# EAGLE board flight comp v5 (EAGLE 9.4.2)
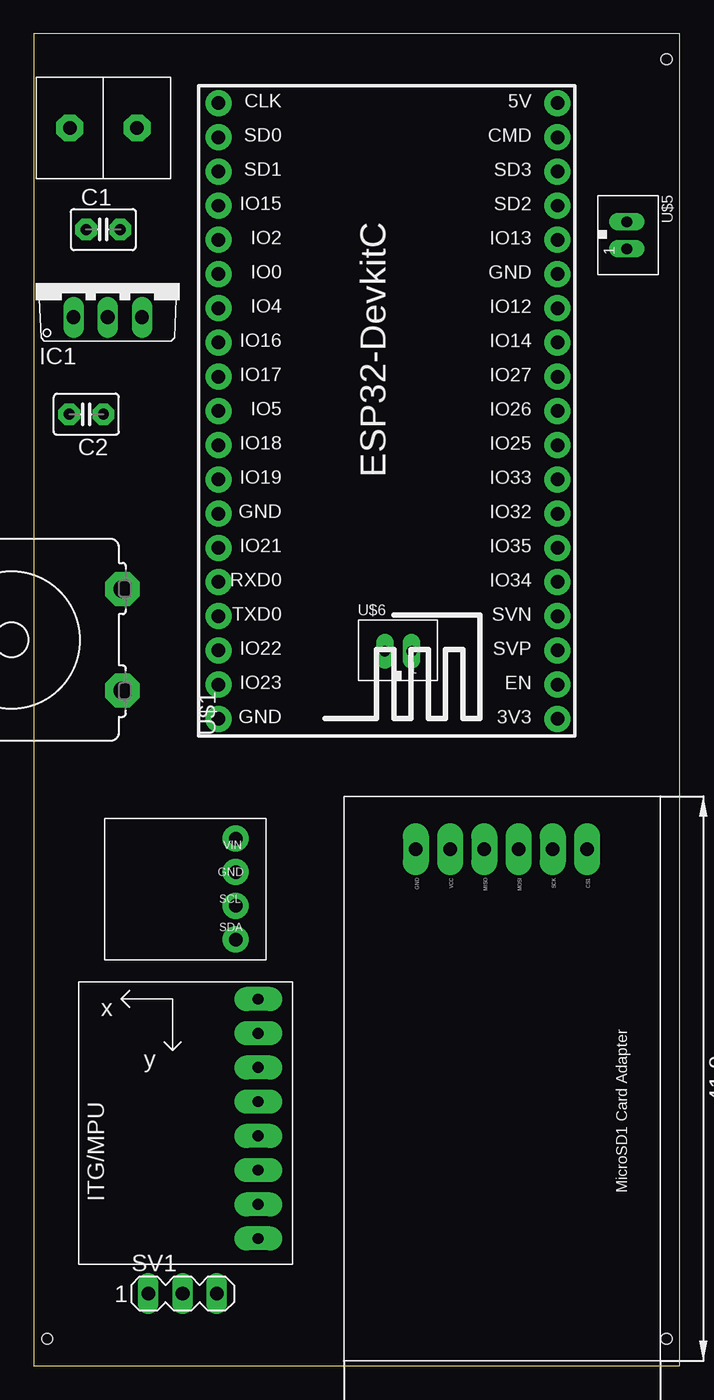
[diagram p0: board, top side]
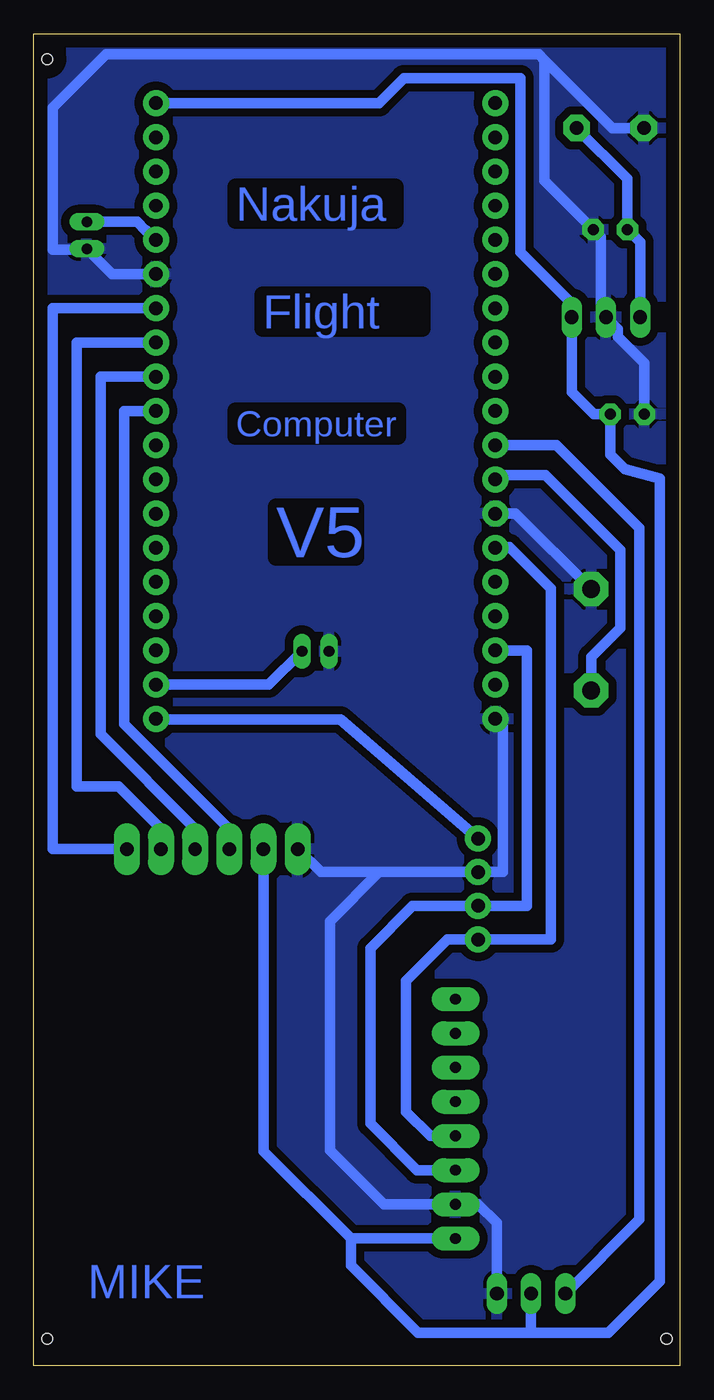
[diagram p1: board, bottom side, seen from below]

Size 48 x 98.9 mm. Coordinates in mm from the lower left corner, seen from the top.
Outline: 0,0 48,0 48,98.9 0,98.9 0,0
Copper layers (1*16): Top 0.035mm / dielectric 1.5mm / Bottom 0.035mm
Design rules "default *": minimum track width 30mil, minimum drill 0.35mm, track to track 20mil, track to pad 20mil, pad to pad 20mil, via to via 6mil, smd to smd 6mil, copper to edge 40mil, drill to drill 6mil, minimum pad ring 10mil, minimum via ring 8mil, stop-mask expansion 4mil, vias tented up to drill 0mil, thermal gap 10mil
Holes 0.8 mm at 47,97 47,2 1,2

## Footprints (pad centres in the part's own frame; a part is rotated, then mirrored left to right if it is on the bottom)
C2.5-3 = drill 0.813 pad 1.6 octagon: 1 -1.27,0; 2 1.27,0
TO220V = drill 1.016 long: 1 -2.54,-2.54; 2 0,-2.54; 3 2.54,-2.54
B/C11L = drill 1.321 pad 2.54 octagon: 1 -3.759,-8.255; 2 3.759,-8.255
MA03-1 = drill 1.016 long: 1 -2.54,0; 2 0,0; 3 2.54,0
GY-521 = drill 0.8 pad 1.778 long: ADO -8.89,-6.35; GND -8.89,6.35; INT -8.89,-8.89; SCL -8.89,3.81; SDA -8.89,1.27; VCC -8.89,8.89; XCL -8.89,-3.81; XDA -8.89,-1.27
ESP32-DEVKITC = drill 1 pad 1.93: 1 -22.87,-11.42; 2 -20.33,-11.42; 3 -17.79,-11.42; 4 -15.25,-11.42; 5 -12.71,-11.42; 6 -10.17,-11.42; 7 -7.63,-11.42; 8 -5.09,-11.42; 9 -2.55,-11.42; 10 -0.01,-11.42; 11 2.53,-11.42; 12 5.07,-11.42; 13 7.61,-11.42; 14 10.15,-11.42; 15 12.69,-11.42; 16 15.23,-11.42; 17 17.77,-11.42; 18 20.31,-11.42; 19 22.85,-11.42; 20 22.85,13.77; 21 20.31,13.77; 22 17.77,13.77; 23 15.23,13.77; 24 12.69,13.77; 25 10.15,13.77; 26 7.61,13.77; 27 5.07,13.77; 28 2.53,13.77; 29 -0.01,13.77; 30 -2.55,13.77; 31 -5.09,13.77; 32 -7.63,13.77; 33 -10.17,13.77; 34 -12.71,13.77; 35 -15.25,13.77; 36 -17.79,13.77; 37 -20.33,13.77; 38 -22.87,13.77
MICROSDADAPTER = drill 1 pad 1.93 long: CS1 3.9,17.8; GND1 3.9,5.1; MISO1 3.9,10.18; MOSI1 3.9,12.72; SCK1 3.9,15.26; VCC1 3.9,7.64
BMP180 = drill 1 pad 1.93: GND 4,9.73; SCL 6.5,9.73; SDA 9,9.73; VIN 1.5,9.73
DBCONN-1X2 = drill 1 pad 2 octagon: P0 -2.54,0; P1 2.46,0
JST_B2B-PH_HEADER = drill 0.8 long: P1 1.075,0.048; P2 -0.925,0.048

## Placement (x,y rotation side)
C1  [C2.5-3]  5.17,84.36 0 top
C2  [C2.5-3]  3.91,70.64 180 top
IC1  7805TV  [TO220V]  5.5,80.39 0 top
SG1  B/C11L  [B/C11L]  -1.66,53.9 90 top
SV1  [MA03-1]  11.06,5.36 0 top
U1  GY-521MPU6050  [GY-521]  7.78,18.34 180 top
U$1  ESP32DEVKITC  [ESP32-DEVKITC]  27.49,70.9 90 top
U$2  MICROSDADAPTER  [MICROSDADAPTER]  23.29,42.27 270 top
U$3  BMP180  [BMP180]  5.27,40.65 270 top
U$4  DBCONN-1X2  [DBCONN-1X2]  5.22,91.9 0 top
U$5  JST-PH_2-PIN_HEADER  [JST_B2B-PH_HEADER]  44,84 270 top
U$6  JST-PH_2-PIN_HEADER  [JST_B2B-PH_HEADER]  27,53 0 top

## Library data of the parts
C1 C2 = capacitor-wima
IC1 = linear
SG1 = buzzer; OC_FARNELL: unknown; OC_NEWARK: unknown
SV1 = con-lstb; OC_FARNELL: unknown; OC_NEWARK: unknown
U1 = gy-521
U$1 = ESP32-DEVKITC
U$2 = MicroSD Card Adapter
U$3 = bmp1802
U$4 = Terminal Block Connector
U$5 U$6 = srg

## Nets
3V3: U$1.1 U$3.VIN
5V: C2.1 IC1.3 SV1.2 U1.VCC U$1.19 U$2.VCC1
BUZZER: SG1.1 U$1.31
CS: U$1.13 U$2.CS1
EN: U$1.2 U$6.P1
GND: C1.2 C2.2 IC1.2 SG1.2 SV1.3 U1.GND U$1.14 U$1.32 U$1.38 U$2.GND1 U$3.GND U$4.P0 U$5.P1 U$6.P2
MISO: U$1.10 U$2.MISO1
MOSI: U$1.11 U$2.MOSI1
N$1: C1.1 IC1.1 U$4.P1
PWM: SV1.1 U$1.30
RST: U$1.15 U$5.P2
SCK: U$1.12 U$2.SCK1
SCL: U1.SCL U$1.36 U$3.SCL
SDA: U1.SDA U$1.33 U$3.SDA

## Tracks (layer width: path | path; a pad name or v marks a point on that pad's centre or on a via)
3V3
  Bottom 0.762: U$3.VIN 25.2,48 38.88,48 U$1.1
5V
  Bottom 0.762: 11,2.45 5.34,2.45 1.5,6.28 1.5,65.88 4.11,66.57 5.18,67.64 C2.1 6.39,70.64 8.04,72.29 IC1.3 8.04,78.85 11.87,82.68 11.87,95.6 20.49,95.6 22.34,93.75 U$1.19 | 11,2.45 19.45,2.45 24.45,7.45 24.45,9.45 | SV1.2 11.06,2.51 11,2.45 | U$2.VCC1 30.93,15.93 24.45,9.45 | 24.45,9.45 U1.VCC
BUZZER
  Bottom 0.762: SG1.1 6.59,52.61 4.44,54.77 4.44,60.55 10.01,66.12 13.41,66.12 U$1.31
CS
  Bottom 0.762: U$2.CS1 46.57,38.37 46.57,78.51 U$1.13
EN
  Bottom 0.762: U$6.P1 30.55,50.57 U$1.2
GND
  Bottom 0.762: U$1.14 42.17,81.05 U$5.P1 44.09,82.88 46.6,82.88 46.6,93.4 42.63,97.37 10.48,97.37 10.05,96.95 | U$1.38 13.15,47.46 13.15,36.65 U$3.GND 22.35,36.65 | U$4.P0 5.01,91.9 10.05,96.95 | C2.2 2.64,74.43 4.61,76.4 4.61,76.96 IC1.2 5.89,78.24 5.89,83.81 C1.2 10.05,87.97 10.05,96.95 | SG1.2 12.21,63.27 U$1.32 | SV1.3 13.6,10.6 15,12 16,12 | 17,12 17.01,11.99 21.99,11.99 26,16 26,33 22.35,36.65 | U$2.GND1 26.67,36.65 22.35,36.65
  pour Bottom (isolate 0.61): -9,104 61,104 66,99 66,0 58,-8 -9,-8 -21,4 -21,92
MISO
  Bottom 0.762: U$1.10 41.26,70.89 41.26,47.66 33.47,39.87 U$2.MISO1
MOSI
  Bottom 0.762: U$2.MOSI1 36.01,39.87 43.03,46.89 43.03,73.43 U$1.11
N$1
  Bottom 0.762: U$4.P1 3.9,88.12 C1.1 2.96,83.42 IC1.1
PWM
  Bottom 0.762: SV1.1 3.02,10.86 3.02,62.19 9.18,68.35 U$1.30
RST
  Bottom 0.762: U$1.15 39.6,84.28 39.68,84.28 40.33,84.92 U$5.P2
SCK
  Bottom 0.762: U$1.12 44.8,75.97 44.8,43 41.68,43 38.55,39.87 U$2.SCK1
SCL
  Bottom 0.762: U1.SCL 19.53,14.53 23,18 23,31 19.85,34.15 U$3.SCL 11.37,34.15 11.37,53.11 U$1.36
SDA
  Bottom 0.762: U1.SDA 18.53,17.07 20.34,18.87 20.34,28.59 17.28,31.65 U$3.SDA 9.6,31.65 9.6,57.69 12.68,60.77 12.72,60.73 U$1.33

## Text on the board
Bottom: Nakuja | Flight | Computer | V5 | MIKE